# EAGLE board ATMega8Motherboard1 (EAGLE 6.2)
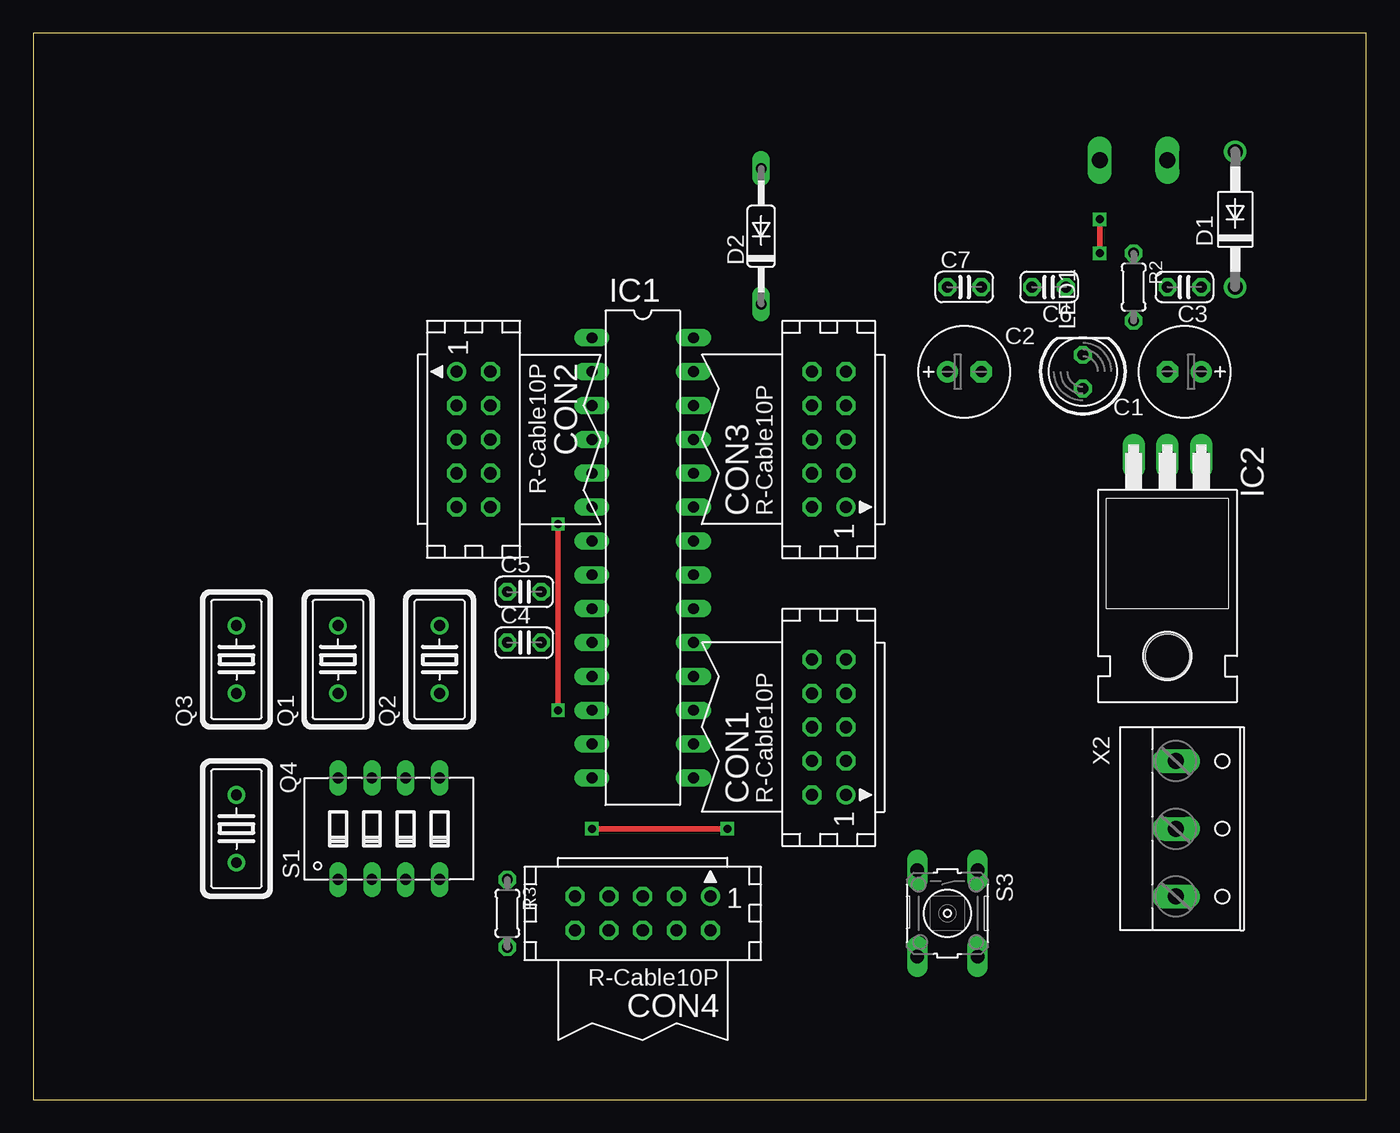
[diagram p0: board, top side]
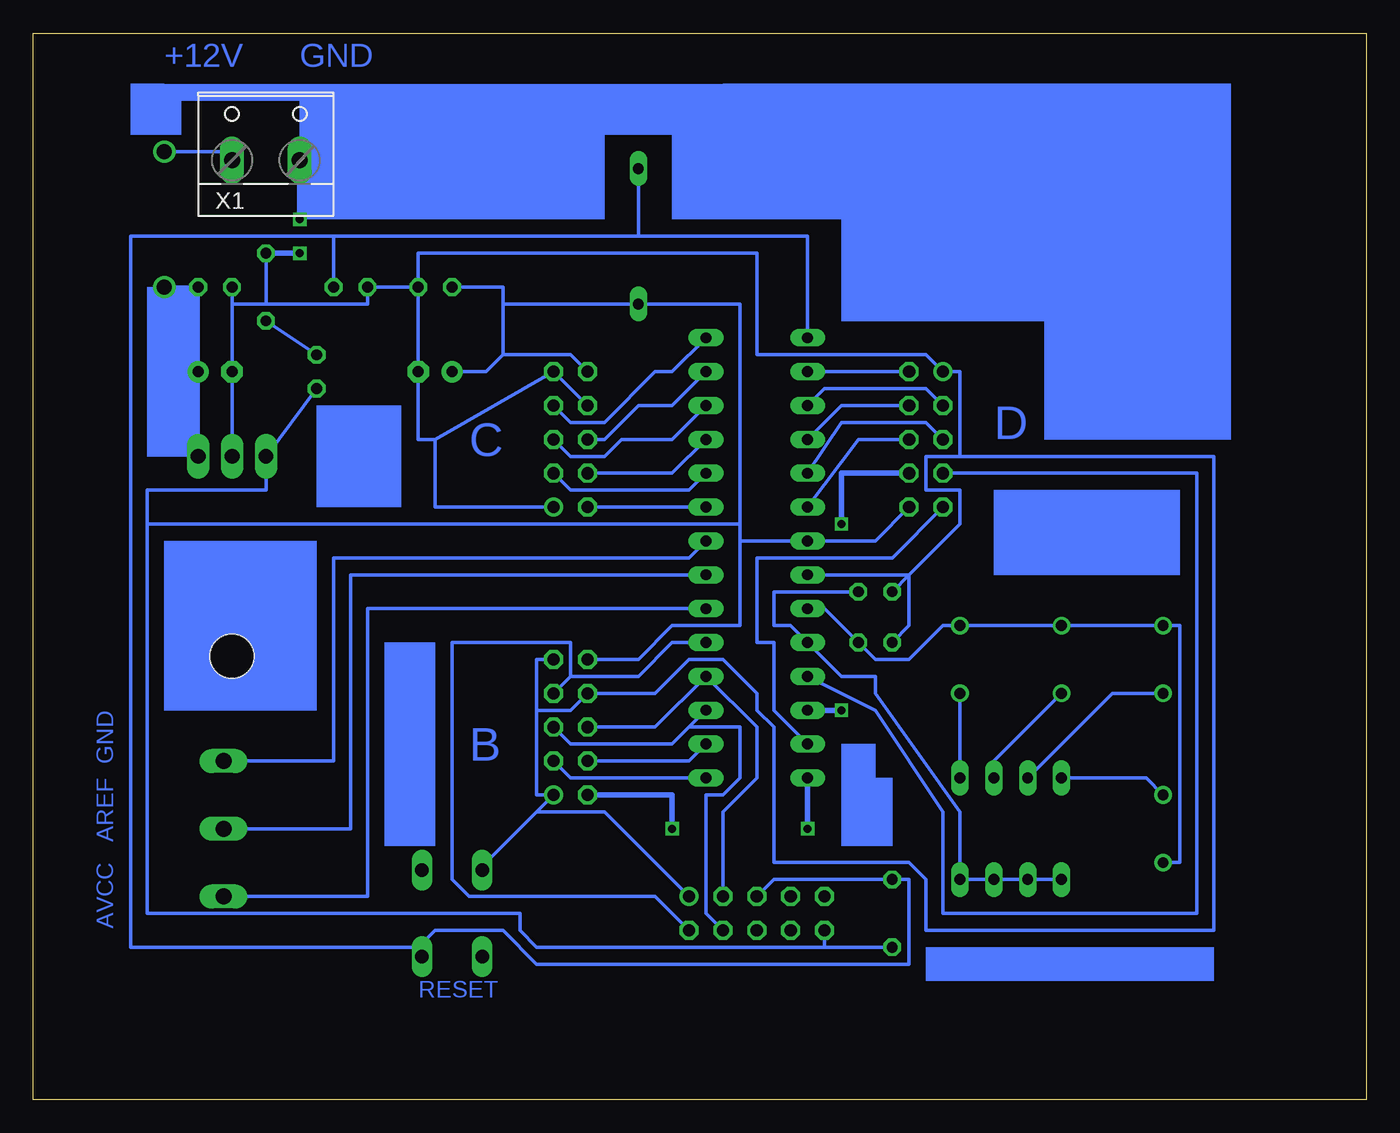
[diagram p1: board, bottom side, seen from below]

Size 100 x 80 mm. Coordinates in mm from the lower left corner, seen from the top.
Outline: 0,0 100,0 100,80 0,80 0,0
Copper layers (1*16): Top 0.035mm / dielectric 1.5mm / Bottom 0.035mm
Design rules: minimum track width 10mil, minimum drill 24mil, track to track 8mil, track to pad 8mil, pad to pad 8mil, via to via 8mil, smd to smd 8mil, copper to edge 40mil, drill to drill 8mil, minimum pad ring 10mil, minimum via ring 8mil, stop-mask expansion 4mil, vias tented up to drill 0mil, thermal gap 10mil

## Footprints (pad centres in the part's own frame; a part is rotated, then mirrored left to right if it is on the bottom)
E2,5-7 = drill 0.813 pad 1.6: + -1.27,0 | drill 0.813 pad 1.6 octagon: - 1.27,0
C025-024X044 = drill 0.813 octagon: 1 -1.27,0; 2 1.27,0
CON10 = drill 0.914: 1 -5.08,-1.27 | drill 0.914 octagon: 2 -5.08,1.27; 3 -2.54,-1.27; 4 -2.54,1.27; 5 0,-1.27; 6 0,1.27; 7 2.54,-1.27; 8 2.54,1.27; 9 5.08,-1.27; 10 5.08,1.27
DO41-10 = drill 1.118: A 5.08,0; C -5.08,0
DO35-10 = drill 0.813 long: A 5.08,0; C -5.08,0
DIL28-3 = drill 0.813 long: 1 -16.51,-3.81; 2 -13.97,-3.81; 3 -11.43,-3.81; 4 -8.89,-3.81; 5 -6.35,-3.81; 6 -3.81,-3.81; 7 -1.27,-3.81; 8 1.27,-3.81; 9 3.81,-3.81; 10 6.35,-3.81; 11 8.89,-3.81; 12 11.43,-3.81; 13 13.97,-3.81; 14 16.51,-3.81; 15 16.51,3.81; 16 13.97,3.81; 17 11.43,3.81; 18 8.89,3.81; 19 6.35,3.81; 20 3.81,3.81; 21 1.27,3.81; 22 -1.27,3.81; 23 -3.81,3.81; 24 -6.35,3.81; 25 -8.89,3.81; 26 -11.43,3.81; 27 -13.97,3.81; 28 -16.51,3.81
TO220H = drill 1.118 long: 1 -2.54,-10.16; 2 0,-10.16; 3 2.54,-10.16 | hole 3.302: 0,4.826
LED5MM = drill 0.813 octagon: A -1.27,0; K 1.27,0
HC18U-V = drill 0.813: 1 -2.54,0; 2 2.54,0
0204/5 = drill 0.813 octagon: 1 -2.54,0; 2 2.54,0
DIP04YL = drill 0.813 long: 1 -3.81,-3.81; 2 -1.27,-3.81; 3 1.27,-3.81; 4 3.81,-3.81; 5 3.81,3.81; 6 1.27,3.81; 7 -1.27,3.81; 8 -3.81,3.81
B3F-10XX = drill 1.016 long: 1 -3.251,2.261; 2 3.251,2.261; 3 -3.251,-2.261; 4 3.251,-2.261
W237-132 = drill 1.194 long: 1 -2.54,-0.635; 2 2.54,-0.635
W237-133 = drill 1.194 long: 1 -5.08,-0.635; 2 0,-0.635; 3 5.08,-0.635

## Placement (x,y rotation side)
C1  1000uF  [E2,5-7]  86.36,54.61 180 top
C2  1000uF  [E2,5-7]  69.85,54.61 0 top
C3  100n  [C025-024X044]  86.36,60.96 180 top
C4  33p  [C025-024X044]  36.83,34.29 0 top
C5  33p  [C025-024X044]  36.83,38.1 0 top
C6  100n  [C025-024X044]  76.2,60.96 180 top
C7  100n  [C025-024X044]  69.85,60.96 0 top
CON1  [CON10]  59.69,27.94 90 top
CON2  [CON10]  33.02,49.53 270 top
CON3  [CON10]  59.69,49.53 90 top
CON4  [CON10]  45.72,13.97 180 top
D1  1N4004  [DO41-10]  90.17,66.04 90 top
D2  1N4148  [DO35-10]  54.61,64.77 90 top
IC1  MEGA8-P  [DIL28-3]  45.72,40.64 270 top
IC2  7805T  [TO220H]  85.09,38.1 180 top
LED1  [LED5MM]  78.74,54.61 90 top
Q1  12Mhz  [HC18U-V]  22.86,33.02 90 top
Q2  12Mhz  [HC18U-V]  30.48,33.02 90 top
Q3  12Mhz  [HC18U-V]  15.24,33.02 90 top
Q4  12Mhz  [HC18U-V]  15.24,20.32 270 top
R2  330R  [0204/5]  82.55,60.96 270 top
R3  1k  [0204/5]  35.56,13.97 270 top
S1  [DIP04YL]  26.67,20.32 0 top
S3  [B3F-10XX]  68.58,13.97 270 top
X1  [W237-132]  82.55,71.12 0 bottom
X2  [W237-133]  86.36,20.32 270 top

## Library data of the parts
C1-C7 R2 R3 = rcl
CON1-CON4 = con-harting
D1 D2 = diode
IC1 = atmel
IC2 = linear
LED1 = led
Q1-Q4 = crystal
S1 = switch-dil; OC_FARNELL: unknown; OC_NEWARK: unknown
S3 = switch-omron; MPN: B3F-1000; OC_FARNELL: 176432; OC_NEWARK: 36M3542
X1 X2 = con-wago-508; OC_FARNELL: unknown; OC_NEWARK: unknown

## Nets
+5V: C2.+ C7.1 CON1.10 CON2.10 CON3.10 CON4.10 D2.C IC1.7 IC2.3 LED1.A R3.2
GND: C1.- C2.- C3.2 C4.1 C5.1 C6.2 C7.2 CON1.1 CON1.8 CON1.9 CON2.1 CON3.1 CON3.8 CON3.9 CON4.1 IC1.8 IC2.2 R2.1 S3.3 X1.2
N$1: D1.A X1.1
N$2: C1.+ C3.1 D1.C IC2.1
N$3: CON1.3 IC1.15
N$4: CON2.2 IC1.2
N$5: CON2.3 IC1.3
N$6: CON1.2 IC1.14
N$7: IC1.22 X2.1
N$8: CON2.4 IC1.4
N$9: CON2.5 IC1.5
N$10: CON2.6 IC1.6
N$11: CON3.4 IC1.25
N$12: IC1.21 X2.2
N$14: IC1.20 X2.3
N$15: Q4.1 S1.8
N$16: Q3.1 S1.7
N$17: Q1.1 S1.6
N$18: Q2.1 S1.5
N$19: CON3.2 IC1.23
N$20: CON1.4 IC1.16
N$21: LED1.K R2.2
N$22: CON1.5 CON4.4 IC1.17
N$23: CON1.6 CON4.3 IC1.18
N$24: CON1.7 CON4.2 IC1.19
N$25: CON2.7 IC1.11
N$26: CON2.8 IC1.12
N$27: CON2.9 IC1.13
N$28: C5.2 IC1.10 S1.1 S1.2 S1.3 S1.4
N$29: C4.2 IC1.9 Q1.2 Q2.2 Q3.2 Q4.2
N$30: C6.1 CON4.5 D2.A IC1.1 R3.1 S3.2
N$31: CON3.3 IC1.24
N$32: CON3.5 IC1.26
N$33: CON3.6 IC1.27
N$34: CON3.7 IC1.28

## Tracks (layer width: path | path; a pad name or v marks a point on that pad's centre or on a via)
+5V
  Bottom 0.254: LED1.A IC2.3 82.55,45.72 91.44,45.72 91.44,43.18 | CON2.10 36.83,41.91 IC1.7 46.99,41.91 | CON3.10 59.69,55.88 64.77,55.88 | 64.77,55.88 66.04,54.61 C2.+ | 64.77,59.69 D2.C 46.99,59.69 46.99,43.18 | C7.1 64.77,60.96 64.77,59.69 | 64.77,59.69 64.77,55.88 | CON1.10 54.61,33.02 52.07,35.56 46.99,35.56 46.99,41.91 | CON4.10 40.64,11.43 | 40.64,11.43 62.23,11.43 63.5,12.7 63.5,13.97 91.44,13.97 91.44,43.18 | 40.64,11.43 R3.2 | 46.99,43.18 46.99,41.91 | 91.44,43.18 46.99,43.18
GND  (via drill 0.6)
  Top 0.406: v80.01,66.04 v80.01,63.5
  Bottom 0.254: C7.2 C2.- 71.12,49.53 69.85,49.53 | C3.2 85.09,59.69 | 85.09,59.69 C1.- IC2.2 | 85.09,59.69 82.55,59.69 | 82.55,59.69 74.93,59.69 C6.2 C7.2 | CON3.8 CON3.9 69.85,49.53 | 69.85,49.53 69.85,44.45 CON3.1 | C7.2 71.12,63.5 45.72,63.5 45.72,55.88 33.02,55.88 CON2.1 30.48,54.61 30.48,48.26 | C4.1 34.29,35.56 34.29,39.37 | C5.1 34.29,39.37 | 34.29,39.37 30.48,43.18 30.48,45.72 33.02,45.72 33.02,48.26 30.48,48.26 | 62.23,29.21 59.69,29.21 CON1.8 53.34,30.48 50.8,33.02 48.26,33.02 45.72,30.48 45.72,29.21 44.45,27.94 44.45,17.78 34.29,17.78 33.02,16.51 33.02,12.7 11.43,12.7 11.43,48.26 30.48,48.26 | 62.23,29.21 62.23,33.02 CON1.9 | 62.23,21.59 CON1.1 62.23,22.86 62.23,29.21 | 62.23,21.59 66.04,17.78 S3.3 | CON4.1 57.15,21.59 62.23,21.59 | 82.55,59.69 R2.1 | 34.29,39.37 IC1.8
  Bottom 0.406: X1.2 v80.01,66.04 | v80.01,63.5 R2.1
N$1
  Bottom 0.254: D1.A 85.09,71.12 X1.1
N$2
  Bottom 0.254: D1.C C3.1 C1.+ IC2.1
N$3
  Bottom 0.254: IC1.15 59.69,24.13 CON1.3
N$4
  Bottom 0.254: CON2.2 IC1.2
N$5
  Bottom 0.254: IC1.3 40.64,53.34 33.02,53.34 CON2.3
N$6  (via drill 0.6)
  Top 0.406: v52.07,20.32 v41.91,20.32
  Bottom 0.406: CON1.2 52.07,22.86 v52.07,20.32 | v41.91,20.32 IC1.14
N$7
  Bottom 0.254: IC1.22 50.8,40.64 77.47,40.64 77.47,25.4 X2.1
N$8
  Bottom 0.254: IC1.4 39.37,52.07 CON2.4
N$9
  Bottom 0.254: IC1.5 39.37,50.8 33.02,50.8 CON2.5
N$10
  Bottom 0.254: IC1.6 38.1,49.53 CON2.6
N$11
  Bottom 0.254: IC1.25 52.07,46.99 CON3.4
N$12
  Bottom 0.254: IC1.21 76.2,39.37 76.2,20.32 X2.2
N$14
  Bottom 0.254: IC1.20 74.93,36.83 74.93,15.24 X2.3
N$15
  Bottom 0.254: Q4.1 16.51,24.13 S1.8
N$16
  Bottom 0.254: S1.7 19.05,30.48 Q3.1
N$17
  Bottom 0.254: Q1.1 27.94,25.4 S1.6
N$18
  Bottom 0.254: Q2.1 S1.5
N$19
  Bottom 0.254: CON3.2 IC1.23
N$20
  Bottom 0.254: IC1.16 50.8,25.4 CON1.4
N$21
  Bottom 0.254: R2.2 LED1.K
N$22
  Bottom 0.254: 50.8,27.94 52.07,26.67 59.69,26.67 CON1.5 | 50.8,27.94 IC1.17 | CON4.4 49.53,13.97 49.53,22.86 48.26,22.86 46.99,24.13 46.99,27.94 50.8,27.94
N$23
  Bottom 0.254: CON1.6 53.34,27.94 IC1.18 45.72,27.94 45.72,24.13 48.26,21.59 CON4.3
N$24
  Bottom 0.254: IC1.19 52.07,34.29 54.61,31.75 59.69,31.75 | CON1.7 59.69,31.75 | CON4.2 53.34,15.24 67.31,15.24 68.58,16.51 68.58,34.29 59.69,34.29 59.69,31.75
N$25
  Bottom 0.254: IC1.11 36.83,29.21 31.75,21.59 31.75,13.97 12.7,13.97 12.7,46.99 CON2.7
N$26  (via drill 0.6)
  Top 0.406: v39.37,43.18 v39.37,29.21
  Bottom 0.406: CON2.8 39.37,46.99 v39.37,43.18 | v39.37,29.21 IC1.12
N$27
  Bottom 0.254: IC1.13 44.45,29.21 44.45,34.29 45.72,34.29 45.72,40.64 35.56,40.64 CON2.9
N$28
  Bottom 0.254: S1.1 S1.2 S1.3 S1.4 30.48,21.59 36.83,30.48 36.83,31.75 39.37,31.75 IC1.10 43.18,35.56 44.45,35.56 44.45,38.1 C5.2
N$29
  Bottom 0.254: Q4.2 13.97,17.78 13.97,35.56 Q3.2 Q1.2 Q2.2 31.75,35.56 34.29,33.02 36.83,33.02 C4.2 40.64,36.83 IC1.9
N$30
  Bottom 0.254: 54.61,64.77 41.91,64.77 IC1.1 | 77.47,64.77 C6.1 | 54.61,64.77 77.47,64.77 | 54.61,64.77 D2.A | CON4.5 44.45,16.51 R3.1 34.29,16.51 34.29,10.16 62.23,10.16 64.77,12.7 69.85,12.7 71.12,11.43 | 77.47,64.77 92.71,64.77 92.71,11.43 71.12,11.43 | 71.12,11.43 S3.2
N$31
  Bottom 0.254: IC1.24 50.8,45.72 59.69,45.72 CON3.3
N$32
  Bottom 0.254: IC1.26 52.07,49.53 55.88,49.53 57.15,48.26 59.69,48.26 CON3.5
N$33
  Bottom 0.254: IC1.27 52.07,52.07 54.61,52.07 57.15,49.53 CON3.6
N$34
  Bottom 0.254: IC1.28 52.07,54.61 53.34,54.61 57.15,50.8 59.69,50.8 CON3.7
(copper drawn outside any net)
  shapes: Bottom area x19

## Text on the board
Bottom: GND | +12V | D | C | GND | B | AREF | AVCC | RESET